# EAGLE board Adapter-RJ45-SignalHead_array (EAGLE 7.7.0)
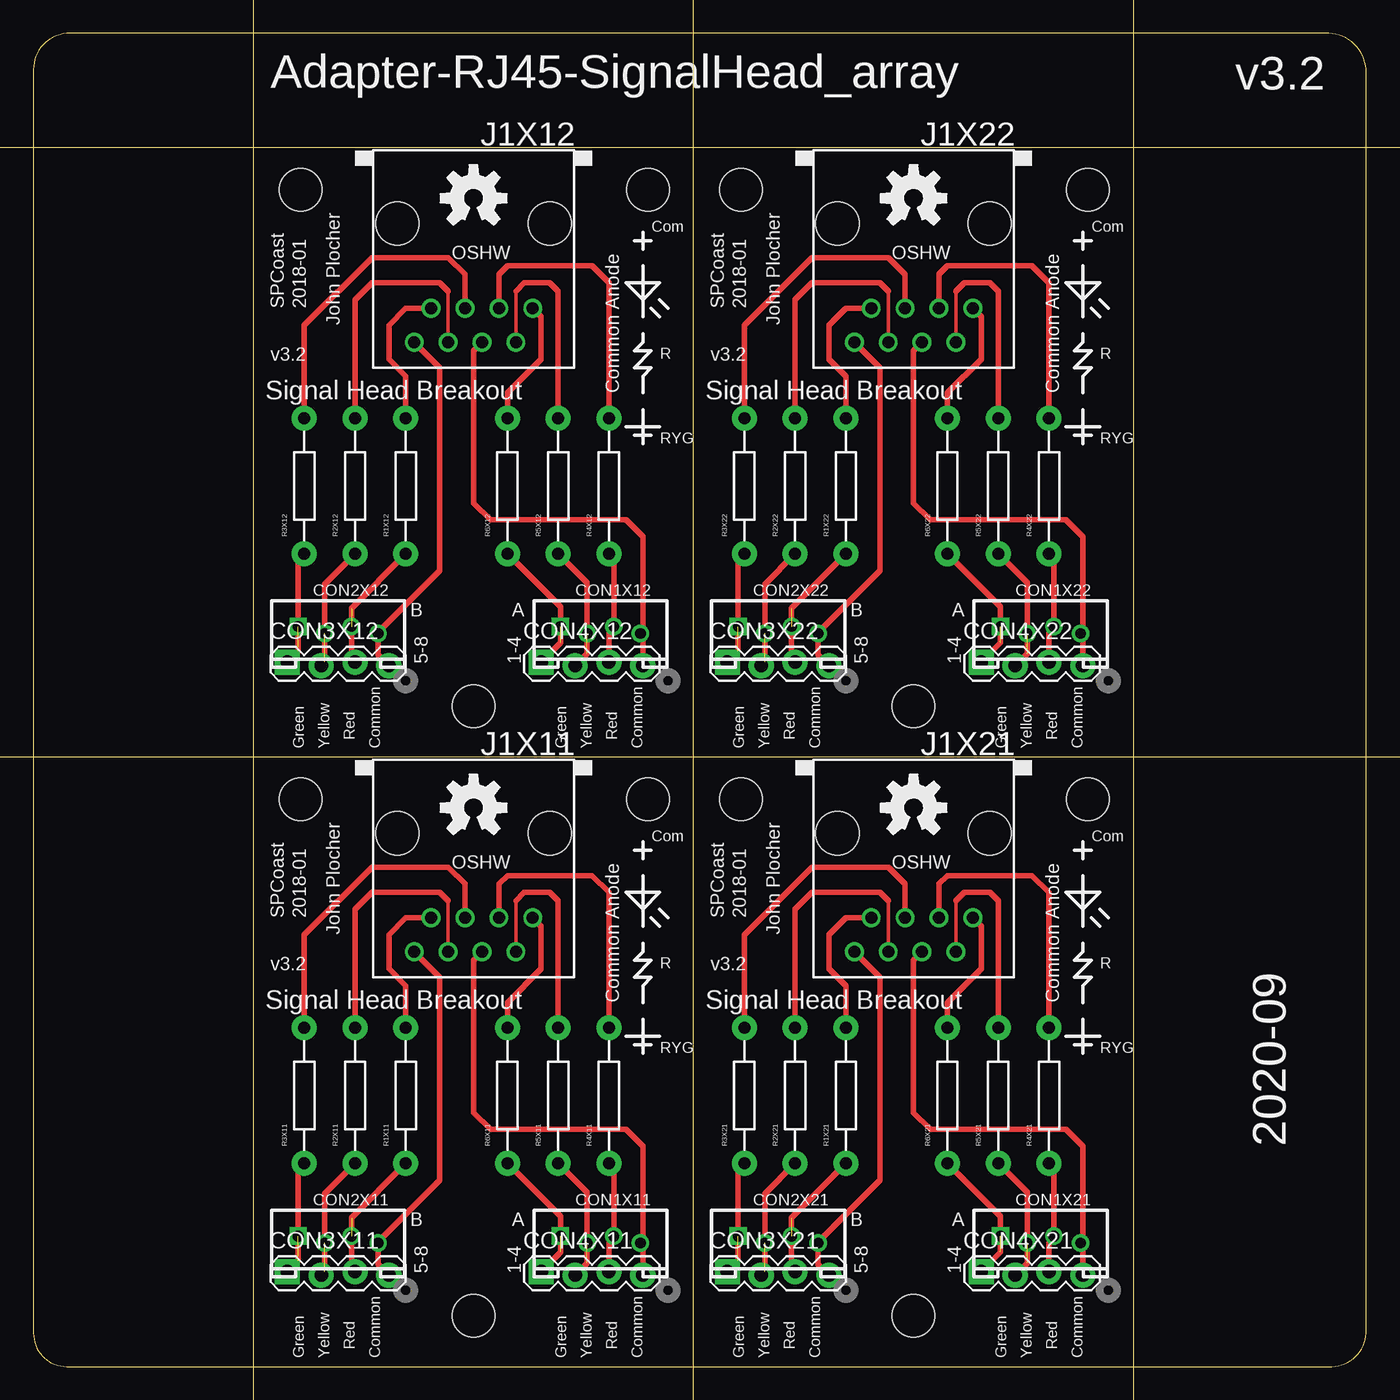
[diagram p0: board, top side]
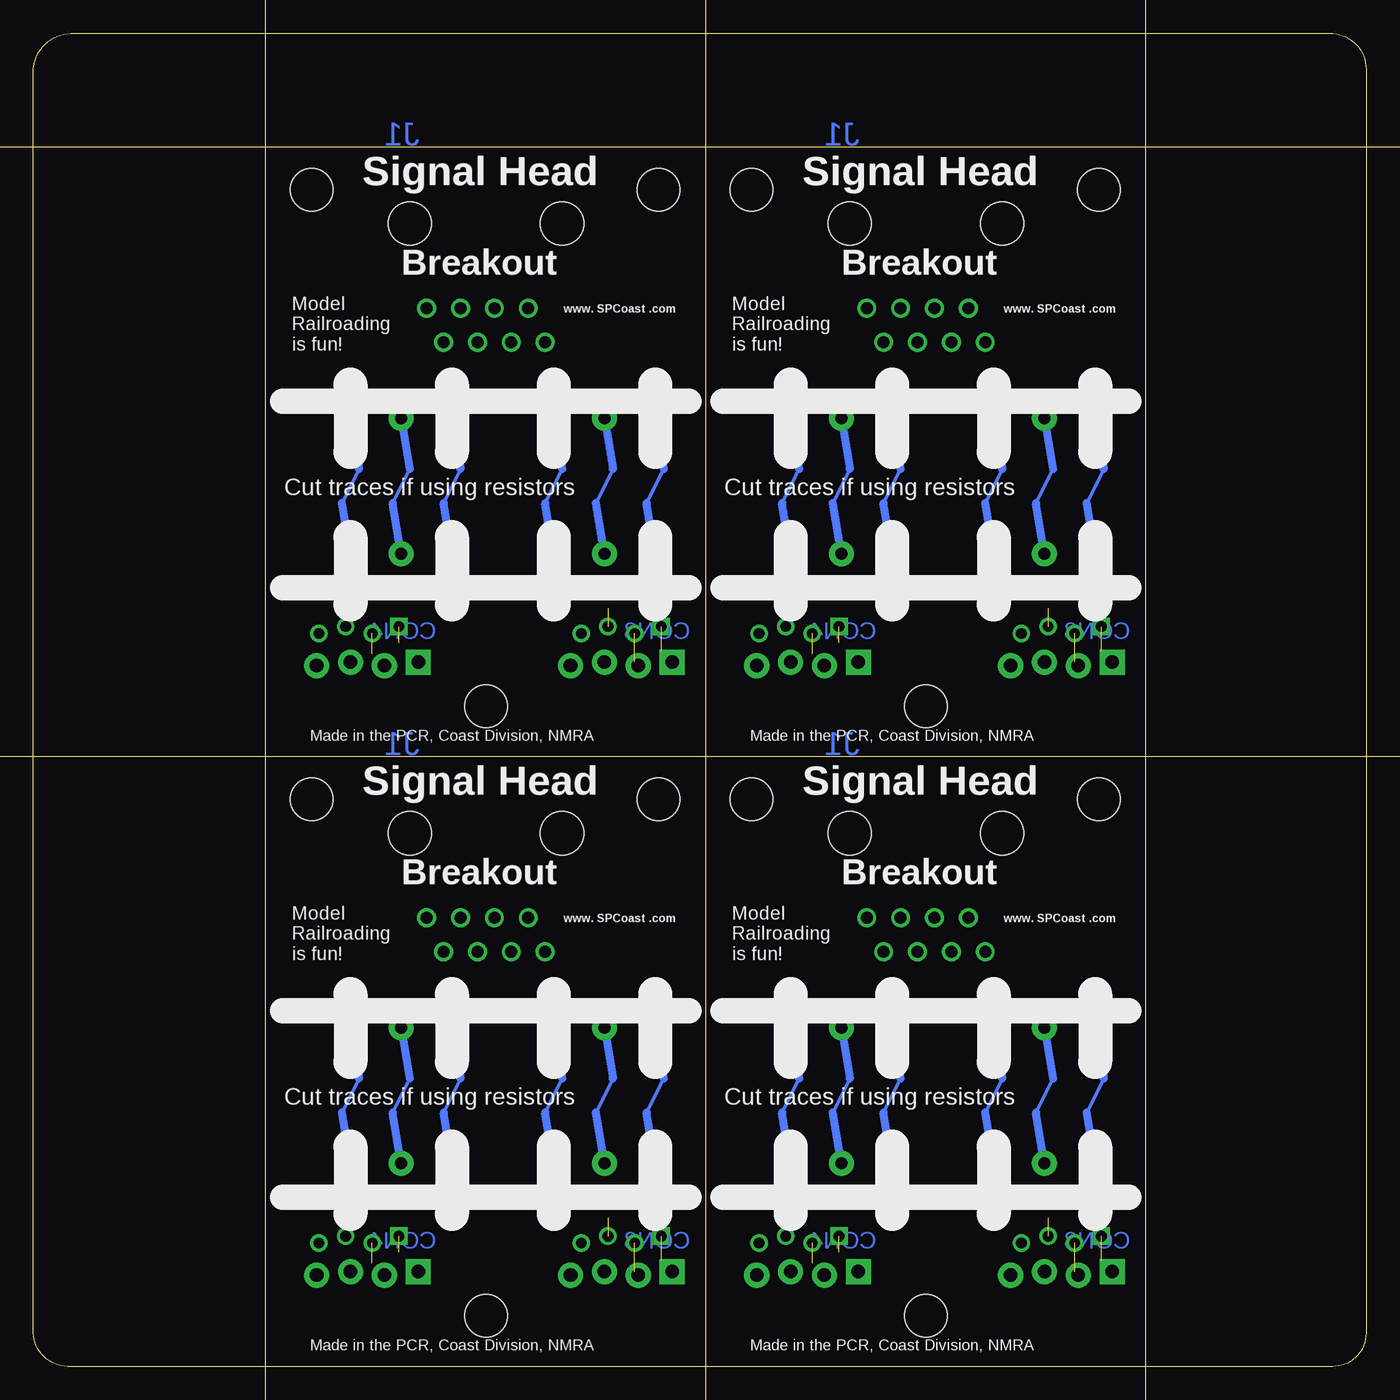
[diagram p1: board, bottom side, seen from below]

Size 100.01 x 100 mm. Coordinates in mm from the lower left corner, seen from the top.
Copper layers (1*16): Top 0.035mm / dielectric 1.5mm / Bottom 0.035mm
Design rules "default": minimum track width 10mil, minimum drill 0.6mm, track to track 8mil, track to pad 8mil, pad to pad 8mil, via to via 8mil, smd to smd 8mil, copper to edge 40mil, drill to drill 8mil, minimum pad ring 10mil, minimum via ring 8mil, stop-mask expansion 4mil, vias tented up to drill 0mil, thermal gap 10mil
Holes 3.2 mm at 20.08,42.55 46.11,42.55 33.03,3.81 20.08,88.27 46.11,88.27 33.03,49.53 53.1,42.55 79.13,42.55 66.05,3.81 53.1,88.27 79.13,88.27 66.05,49.53
Milling: 6 lines

## Footprints (pad centres in the part's own frame; a part is rotated, then mirrored left to right if it is on the bottom)
4P-2.0 = drill 0.8 pad 1.27 square: 1 -3,0.254 | drill 0.8 pad 1.27: 2 -1,-0.254; 3 1,0.254; 4 3,-0.254
1X04_LOCK = drill 1.016 pad 1.88 square: 1 0,0.127 | drill 1.016 pad 1.88: 2 2.54,-0.127; 3 5.08,0.127; 4 7.62,-0.127
RJ45-NO-SHIELD = drill 0.9 pad 1.4: 1 -4.445,6.35; 2 -3.175,8.89; 3 -1.905,6.35; 4 -0.635,8.89; 5 0.635,6.35; 6 1.905,8.89; 7 3.175,6.35; 8 4.445,8.89 | hole 3.251: -5.715,0; 5.715,0
CUT-R = drill 0.9 pad 1.88: P1 5.08,0; P2 -5.08,0

## Placement (x,y rotation side)
CON1X11  2mm  [4P-2.0]  42.55,9.53 0 top
CON1X12  2mm  [4P-2.0]  42.55,55.25 0 top
CON1X21  2mm  [4P-2.0]  75.57,9.53 0 top
CON1X22  2mm  [4P-2.0]  75.57,55.25 0 top
CON2X11  2mm  [4P-2.0]  22.87,9.53 0 top
CON2X12  2mm  [4P-2.0]  22.87,55.25 0 top
CON2X21  2mm  [4P-2.0]  55.89,9.53 0 top
CON2X22  2mm  [4P-2.0]  55.89,55.25 0 top
CON3X11  0.100  [1X04_LOCK]  19.06,6.99 0 top
CON3X12  0.100  [1X04_LOCK]  19.06,52.71 0 top
CON3X21  0.100  [1X04_LOCK]  52.08,6.99 0 top
CON3X22  0.100  [1X04_LOCK]  52.08,52.71 0 top
CON4X11  0.100  [1X04_LOCK]  38.11,6.99 0 top
CON4X12  0.100  [1X04_LOCK]  38.11,52.71 0 top
CON4X21  0.100  [1X04_LOCK]  71.13,6.99 0 top
CON4X22  0.100  [1X04_LOCK]  71.13,52.71 0 top
J1X11  RJ45  [RJ45-NO-SHIELD]  33.03,40.01 180 top
J1X12  RJ45  [RJ45-NO-SHIELD]  33.03,85.73 180 top
J1X21  RJ45  [RJ45-NO-SHIELD]  66.05,40.01 180 top
J1X22  RJ45  [RJ45-NO-SHIELD]  66.05,85.73 180 top
R1X11  nostuff  [CUT-R]  27.95,20.32 90 top
R1X12  nostuff  [CUT-R]  27.95,66.04 90 top
R1X21  nostuff  [CUT-R]  60.97,20.32 90 top
R1X22  nostuff  [CUT-R]  60.97,66.04 90 top
R2X11  nostuff  [CUT-R]  24.14,20.32 90 top
R2X12  nostuff  [CUT-R]  24.14,66.04 90 top
R2X21  nostuff  [CUT-R]  57.16,20.32 90 top
R2X22  nostuff  [CUT-R]  57.16,66.04 90 top
R3X11  nostuff  [CUT-R]  20.33,20.32 90 top
R3X12  nostuff  [CUT-R]  20.33,66.04 90 top
R3X21  nostuff  [CUT-R]  53.35,20.32 90 top
R3X22  nostuff  [CUT-R]  53.35,66.04 90 top
R4X11  nostuff  [CUT-R]  43.19,20.32 90 top
R4X12  nostuff  [CUT-R]  43.19,66.04 90 top
R4X21  nostuff  [CUT-R]  76.21,20.32 90 top
R4X22  nostuff  [CUT-R]  76.21,66.04 90 top
R5X11  nostuff  [CUT-R]  39.38,20.32 90 top
R5X12  nostuff  [CUT-R]  39.38,66.04 90 top
R5X21  nostuff  [CUT-R]  72.4,20.32 90 top
R5X22  nostuff  [CUT-R]  72.4,66.04 90 top
R6X11  nostuff  [CUT-R]  35.57,20.32 90 top
R6X12  nostuff  [CUT-R]  35.57,66.04 90 top
R6X21  nostuff  [CUT-R]  68.59,20.32 90 top
R6X22  nostuff  [CUT-R]  68.59,66.04 90 top
U$1X1  BOARD  [BOARD-SEEED10X10-NOHOLES]  0.01,0 0 top
U$1X11  OSHW  [OSHW-LOGO-M]  33.03,41.91 0 top
U$1X12  OSHW  [OSHW-LOGO-M]  33.03,87.63 0 top
U$1X21  OSHW  [OSHW-LOGO-M]  66.05,41.91 0 top
U$1X22  OSHW  [OSHW-LOGO-M]  66.05,87.63 0 top

## Library data of the parts
CON1X11 CON1X12 CON1X21 CON1X22 CON2X11 CON2X12 CON2X21 CON2X22 CON3X11 CON3X12 CON3X21 CON3X22 CON4X11 CON4X12 CON4X21 CON4X22 J1X11 J1X12 J1X21 J1X22 R1X11 R1X12 R1X21 R1X22 R2X11 R2X12 R2X21 R2X22 R3X11 R3X12 R3X21 R3X22 R4X11 R4X12 R4X21 R4X22 R5X11 R5X12 R5X21 R5X22 R6X11 R6X12 R6X21 R6X22 U$1X1 U$1X11 U$1X12 U$1X21 U$1X22 = SPCoast

## Nets
A-COMMONX11: CON1X11.4 CON4X11.4 J1X11.4
A-COMMONX12: CON1X12.4 CON4X12.4 J1X12.4
A-COMMONX21: CON1X21.4 CON4X21.4 J1X21.4
A-COMMONX22: CON1X22.4 CON4X22.4 J1X22.4
AGRX11: CON1X11.1 CON4X11.1 R6X11.P2
AGRX12: CON1X12.1 CON4X12.1 R6X12.P2
AGRX21: CON1X21.1 CON4X21.1 R6X21.P2
AGRX22: CON1X22.1 CON4X22.1 R6X22.P2
AGX11: J1X11.1 R6X11.P1
AGX12: J1X12.1 R6X12.P1
AGX21: J1X21.1 R6X21.P1
AGX22: J1X22.1 R6X22.P1
ARRX11: CON1X11.3 CON4X11.3 R4X11.P2
ARRX12: CON1X12.3 CON4X12.3 R4X12.P2
ARRX21: CON1X21.3 CON4X21.3 R4X21.P2
ARRX22: CON1X22.3 CON4X22.3 R4X22.P2
ARX11: J1X11.3 R4X11.P1
ARX12: J1X12.3 R4X12.P1
ARX21: J1X21.3 R4X21.P1
ARX22: J1X22.3 R4X22.P1
AYRX11: CON1X11.2 CON4X11.2 R5X11.P2
AYRX12: CON1X12.2 CON4X12.2 R5X12.P2
AYRX21: CON1X21.2 CON4X21.2 R5X21.P2
AYRX22: CON1X22.2 CON4X22.2 R5X22.P2
AYX11: J1X11.2 R5X11.P1
AYX12: J1X12.2 R5X12.P1
AYX21: J1X21.2 R5X21.P1
AYX22: J1X22.2 R5X22.P1
B-COMMONX11: CON2X11.4 CON3X11.4 J1X11.8
B-COMMONX12: CON2X12.4 CON3X12.4 J1X12.8
B-COMMONX21: CON2X21.4 CON3X21.4 J1X21.8
B-COMMONX22: CON2X22.4 CON3X22.4 J1X22.8
BGRX11: CON2X11.1 CON3X11.1 R3X11.P2
BGRX12: CON2X12.1 CON3X12.1 R3X12.P2
BGRX21: CON2X21.1 CON3X21.1 R3X21.P2
BGRX22: CON2X22.1 CON3X22.1 R3X22.P2
BGX11: J1X11.5 R3X11.P1
BGX12: J1X12.5 R3X12.P1
BGX21: J1X21.5 R3X21.P1
BGX22: J1X22.5 R3X22.P1
BRRX11: CON2X11.3 CON3X11.3 R1X11.P2
BRRX12: CON2X12.3 CON3X12.3 R1X12.P2
BRRX21: CON2X21.3 CON3X21.3 R1X21.P2
BRRX22: CON2X22.3 CON3X22.3 R1X22.P2
BRX11: J1X11.7 R1X11.P1
BRX12: J1X12.7 R1X12.P1
BRX21: J1X21.7 R1X21.P1
BRX22: J1X22.7 R1X22.P1
BYRX11: CON2X11.2 CON3X11.2 R2X11.P2
BYRX12: CON2X12.2 CON3X12.2 R2X12.P2
BYRX21: CON2X21.2 CON3X21.2 R2X21.P2
BYRX22: CON2X22.2 CON3X22.2 R2X22.P2
BYX11: J1X11.6 R2X11.P1
BYX12: J1X12.6 R2X12.P1
BYX21: J1X21.6 R2X21.P1
BYX22: J1X22.6 R2X22.P1

## Tracks (layer width: path | path; a pad name or v marks a point on that pad's centre or on a via)
A-COMMONX11
  Top 0.406: J1X11.4 33.03,30.48 33.03,19.05 34.3,17.78 44.46,17.78 45.73,16.51 45.73,9.45 CON1X11.4 45.73,9.23 CON4X11.4
A-COMMONX12
  Top 0.406: J1X12.4 33.03,76.2 33.03,64.77 34.3,63.5 44.46,63.5 45.73,62.23 45.73,55.17 CON1X12.4 45.73,54.95 CON4X12.4
A-COMMONX21
  Top 0.406: J1X21.4 66.05,30.48 66.05,19.05 67.32,17.78 77.48,17.78 78.75,16.51 78.75,9.45 CON1X21.4 78.75,9.23 CON4X21.4
A-COMMONX22
  Top 0.406: J1X22.4 66.05,76.2 66.05,64.77 67.32,63.5 77.48,63.5 78.75,62.23 78.75,55.17 CON1X22.4 78.75,54.95 CON4X22.4
AGRX11  (1 unrouted)
  Top 0.406: R6X11.P2 39.55,11.26 39.55,8.56 CON4X11.1
AGRX12  (1 unrouted)
  Top 0.406: R6X12.P2 39.55,56.98 39.55,54.28 CON4X12.1
AGRX21  (1 unrouted)
  Top 0.406: R6X21.P2 72.57,11.26 72.57,8.56 CON4X21.1
AGRX22  (1 unrouted)
  Top 0.406: R6X22.P2 72.57,56.98 72.57,54.28 CON4X22.1
AGX11
  Top 0.406: J1X11.1 38.11,33.02 38.11,29.85 35.57,27.31 R6X11.P1
AGX12
  Top 0.406: J1X12.1 38.11,78.74 38.11,75.57 35.57,73.03 R6X12.P1
AGX21
  Top 0.406: J1X21.1 71.13,33.02 71.13,29.85 68.59,27.31 R6X21.P1
AGX22
  Top 0.406: J1X22.1 71.13,78.74 71.13,75.57 68.59,73.03 R6X22.P1
ARRX11
  Top 0.406: R4X11.P2 43.55,14.88 CON1X11.3 43.19,9.29 CON4X11.3
ARRX12
  Top 0.406: R4X12.P2 43.55,60.6 CON1X12.3 43.19,55.01 CON4X12.3
ARRX21
  Top 0.406: R4X21.P2 76.57,14.88 CON1X21.3 76.21,9.29 CON4X21.3
ARRX22
  Top 0.406: R4X22.P2 76.57,60.6 CON1X22.3 76.21,55.01 CON4X22.3
ARX11
  Top 0.406: J1X11.3 34.93,36.2 35.57,36.83 41.92,36.83 43.19,35.56 R4X11.P1
ARX12
  Top 0.406: J1X12.3 34.93,81.92 35.57,82.55 41.92,82.55 43.19,81.28 R4X12.P1
ARX21
  Top 0.406: J1X21.3 67.95,36.2 68.59,36.83 74.94,36.83 76.21,35.56 R4X21.P1
ARX22
  Top 0.406: J1X22.3 67.95,81.92 68.59,82.55 74.94,82.55 76.21,81.28 R4X22.P1
AYRX11  (1 unrouted)
  Top 0.406: R5X11.P2 41.55,13.07 41.55,7.77 CON4X11.2
AYRX12  (1 unrouted)
  Top 0.406: R5X12.P2 41.55,58.79 41.55,53.49 CON4X12.2
AYRX21  (1 unrouted)
  Top 0.406: R5X21.P2 74.57,13.07 74.57,7.77 CON4X21.2
AYRX22  (1 unrouted)
  Top 0.406: R5X22.P2 74.57,58.79 74.57,53.49 CON4X22.2
AYX11
  Top 0.254: J1X11.2 36.2,34.93
  Top 0.406: 36.2,34.93 36.84,35.56 38.74,35.56 39.38,34.93 R5X11.P1
AYX12
  Top 0.254: J1X12.2 36.2,80.65
  Top 0.406: 36.2,80.65 36.84,81.28 38.74,81.28 39.38,80.65 R5X12.P1
AYX21
  Top 0.254: J1X21.2 69.22,34.93
  Top 0.406: 69.22,34.93 69.86,35.56 71.76,35.56 72.4,34.93 R5X21.P1
AYX22
  Top 0.254: J1X22.2 69.22,80.65
  Top 0.406: 69.22,80.65 69.86,81.28 71.76,81.28 72.4,80.65 R5X22.P1
B-COMMONX11
  Top 0.406: J1X11.8 30.49,29.21 30.49,13.97 25.92,9.4 CON2X11.4 25.87,7.67 CON3X11.4
B-COMMONX12
  Top 0.406: J1X12.8 30.49,74.93 30.49,59.69 25.92,55.12 CON2X12.4 25.87,53.39 CON3X12.4
B-COMMONX21
  Top 0.406: J1X21.8 63.51,29.21 63.51,13.97 58.94,9.4 CON2X21.4 58.89,7.67 CON3X21.4
B-COMMONX22
  Top 0.406: J1X22.8 63.51,74.93 63.51,59.69 58.94,55.12 CON2X22.4 58.89,53.39 CON3X22.4
BGRX11  (1 unrouted)
  Top 0.406: R3X11.P2 19.87,14.78 19.87,7.93 CON3X11.1
BGRX12  (1 unrouted)
  Top 0.406: R3X12.P2 19.87,60.5 19.87,53.65 CON3X12.1
BGRX21  (1 unrouted)
  Top 0.406: R3X21.P2 52.89,14.78 52.89,7.93 CON3X21.1
BGRX22  (1 unrouted)
  Top 0.406: R3X22.P2 52.89,60.5 52.89,53.65 CON3X22.1
BGX11
  Top 0.406: R3X11.P1 20.33,32.39 25.41,37.47 31.12,37.47 32.39,36.2 J1X11.5
BGX12
  Top 0.406: R3X12.P1 20.33,78.11 25.41,83.19 31.12,83.19 32.39,81.92 J1X12.5
BGX21
  Top 0.406: R3X21.P1 53.35,32.39 58.43,37.47 64.14,37.47 65.41,36.2 J1X21.5
BGX22
  Top 0.406: R3X22.P1 53.35,78.11 58.43,83.19 64.14,83.19 65.41,81.92 J1X22.5
BRRX11  (1 unrouted)
  Top 0.406: R1X11.P2 23.87,11.16 23.87,7.39 CON3X11.3
BRRX12  (1 unrouted)
  Top 0.406: R1X12.P2 23.87,56.88 23.87,53.11 CON3X12.3
BRRX21  (1 unrouted)
  Top 0.406: R1X21.P2 56.89,11.16 56.89,7.39 CON3X21.3
BRRX22  (1 unrouted)
  Top 0.406: R1X22.P2 56.89,56.88 56.89,53.11 CON3X22.3
BRX11
  Top 0.406: R1X11.P1 27.95,28.58 26.68,29.85 26.68,32.39 27.95,33.66 J1X11.7
BRX12
  Top 0.406: R1X12.P1 27.95,74.3 26.68,75.57 26.68,78.11 27.95,79.38 J1X12.7
BRX21
  Top 0.406: R1X21.P1 60.97,28.58 59.7,29.85 59.7,32.39 60.97,33.66 J1X21.7
BRX22
  Top 0.406: R1X22.P1 60.97,74.3 59.7,75.57 59.7,78.11 60.97,79.38 J1X22.7
BYRX11  (1 unrouted)
  Top 0.406: R2X11.P2 21.87,12.97 21.87,7.13 CON3X11.2
BYRX12  (1 unrouted)
  Top 0.406: R2X12.P2 21.87,58.69 21.87,52.85 CON3X12.2
BYRX21  (1 unrouted)
  Top 0.406: R2X21.P2 54.89,12.97 54.89,7.13 CON3X21.2
BYRX22  (1 unrouted)
  Top 0.406: R2X22.P2 54.89,58.69 54.89,52.85 CON3X22.2
BYX11
  Top 0.254: J1X11.6 31.12,34.93
  Top 0.406: 31.12,34.93 30.49,35.56 25.41,35.56 24.14,34.29 R2X11.P1
BYX12
  Top 0.254: J1X12.6 31.12,80.65
  Top 0.406: 31.12,80.65 30.49,81.28 25.41,81.28 24.14,80.01 R2X12.P1
BYX21
  Top 0.254: J1X21.6 64.14,34.93
  Top 0.406: 64.14,34.93 63.51,35.56 58.43,35.56 57.16,34.29 R2X21.P1
BYX22
  Top 0.254: J1X22.6 64.14,80.65
  Top 0.406: 64.14,80.65 63.51,81.28 58.43,81.28 57.16,80.01 R2X22.P1

## Text on the board
Bottom: J1 | J1 | CON3 | CON4 | CON3 | CON4 | J1 | J1 | CON3 | CON4 | CON3 | CON4
tPlace: v3.2 | Com | Com | OSHW | OSHW | SPCoast | 2018-01 | SPCoast | 2018-01 | John Plocher | John Plocher | R | R | v3.2 | v3.2 | Signal Head Breakout | Common Anode | Signal Head Breakout | Common Anode | RYG | RYG | B | A | B | A | 5-8 | 1-4 | 5-8 | 1-4 | Red | Red | Red | Red | Green | Yellow | Common | Green | Yellow | Common | Green | Yellow | Common | Green | Yellow | Common | Com | Com | OSHW | OSHW | SPCoast | 2018-01 | SPCoast | 2018-01 | John Plocher | John Plocher | v3.2 | R | v3.2 | R | Signal Head Breakout | Common Anode | Signal Head Breakout | Common Anode | RYG | RYG | 2020-09 | B | A | B | A | 5-8 | 1-4 | 5-8 | 1-4 | Green | Yellow | Red | Common | Green | Yellow | Red | Common | Green | Yellow | Red | Common | Green | Yellow | Red | Common
bPlace: Signal Head | Signal Head | Breakout | Breakout | www. SPCoast .com | www. SPCoast .com | Model / Railroading / is fun! | Model / Railroading / is fun! | Cut traces if using resistors | Cut traces if using resistors | Made in the PCR, Coast Division, NMRA | Made in the PCR, Coast Division, NMRA | Signal Head | Signal Head | Breakout | Breakout | www. SPCoast .com | www. SPCoast .com | Model / Railroading / is fun! | Model / Railroading / is fun! | Cut traces if using resistors | Cut traces if using resistors | Made in the PCR, Coast Division, NMRA | Made in the PCR, Coast Division, NMRA
Milling: V-Score | V-Score | V-Score | V-Score | V-Score
_tNames: R3 | R2 | R1 | R6 | R5 | R4 | R3 | R2 | R1 | R6 | R5 | R4 | CON2 | CON1 | CON2 | CON1 | R3 | R2 | R1 | R6 | R5 | R4 | R3 | R2 | R1 | R6 | R5 | R4 | CON2 | CON1 | CON2 | CON1